# Altium PCB PCB1.PcbDoc
Units mil, origin at the board's own origin, x right, y up, seen from the top; angles counter-clockwise.
Board outline 1075 x 450 mil, 2 copper layers (Top Layer, Bottom Layer); 7 components, 4 nets, 20 pads, 0 vias.
Unrouted connection lines stored in the file: 6.
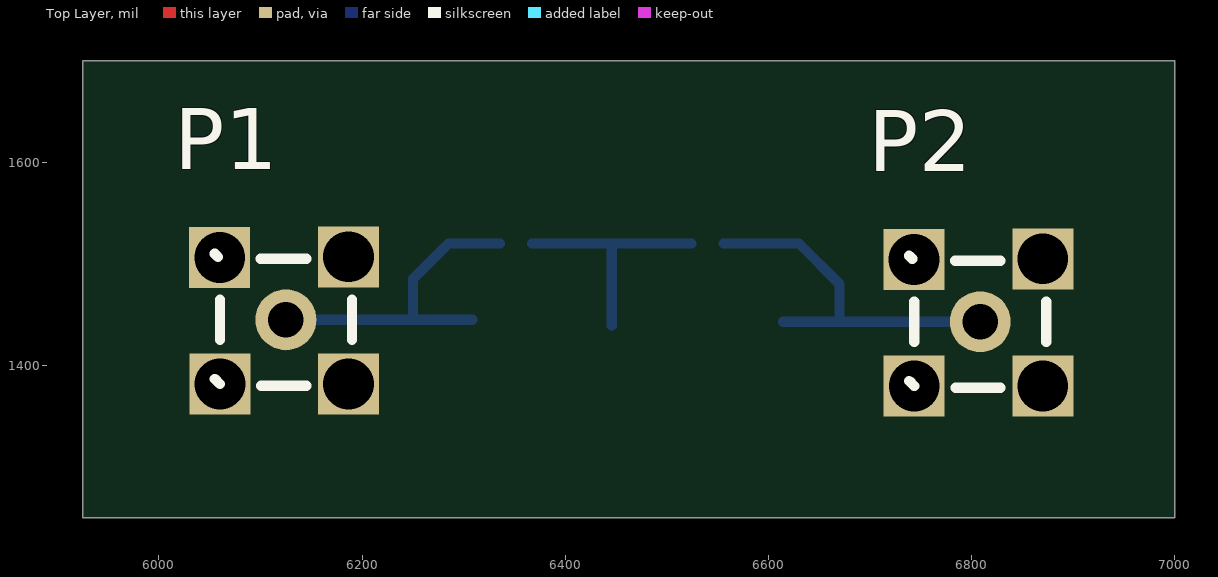
[diagram p0: Top Layer view]
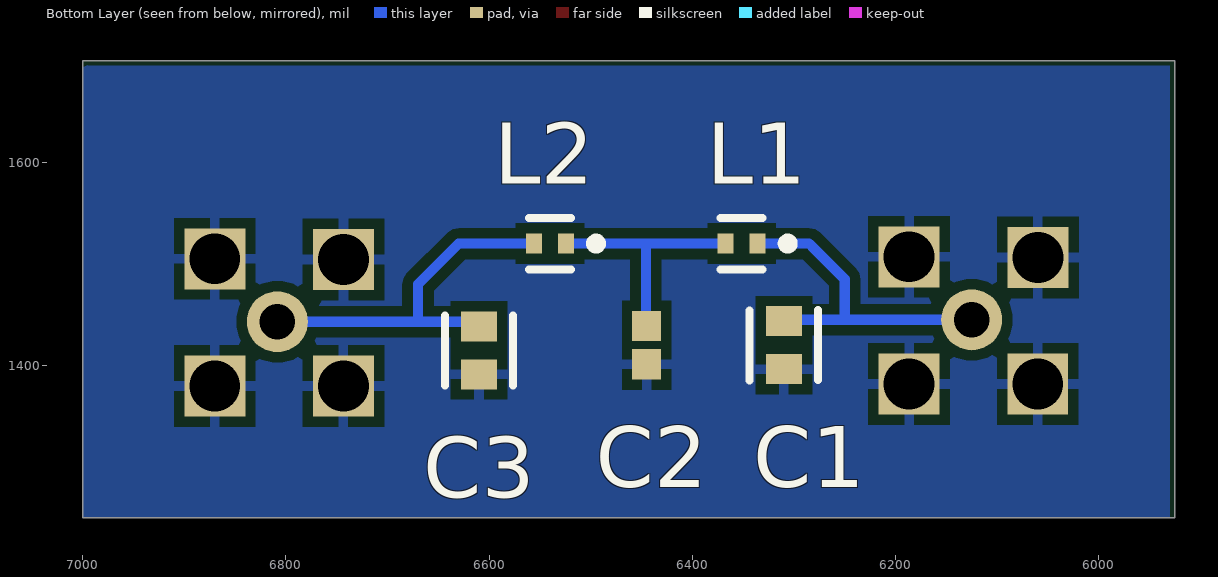
[diagram p1: Bottom Layer view, seen from below]

## Layer stack, top to bottom
Top Solder: solder mask 0.4, Solder Resist, Dk 3.5
Top Layer: signal copper 1.4
Dielectric 1: dielectric 12.6, FR-4, Dk 4.8
Bottom Layer: signal copper 1.4
Bottom Solder: solder mask 0.4, Solder Resist, Dk 3.5

## Board outline
5925,1250 7000,1250 7000,1700 5925,1700

## Design rules (kind name [scope] priority, off if disabled: settings)
Clearance [All] p1: gap=10 ignorepadtopadclearanceinfootprint=FALSE except(0: Arc-Hole Track-Hole SMDPad-Hole THPad-Hole Via-Hole Fill-Hole Poly-Hole Region-Hole Text-Hole)
PolygonConnect [All] p1: connectstyle=Relief reliefconductorwidth=10 reliefentries=4 polygonreliefangle="90 Angle" airgapwidth=10
RoutingVias [All] p1: holewidth=28 width=50 viastyle="Through Hole" minholewidth=28 minwidth=50 maxholewidth=28 maxwidth=50
SolderMaskExpansion [All] p1: expansion=4 istentingtop=FALSE
Width [All] p1: maxlimit=10 minlimit=10 preferedwidth=10
30 further rules are at their usual default settings.

## Components (designator, comment, footprint, x,y, rotation, side; value= is the part's Value field where it differs from the comment)
C1 "C0603C180F5GACTU" FP-C0603C-CF-MFG 6309.88,1420 r270 bottom value="18 pF"
C2 "C0402T330J3GACTU" CAPC1005X55X30ML05T10 6445,1420 r90 bottom
C3 "C0603C180F5GACTU" FP-C0603C-CF-MFG 6610,1415 r270 bottom value="18 pF"
L1 "LQG15WZ62NG02D" FP-LQG15HH_02-MFG 6351.38,1520 r0 bottom
L2 "LQG15WZ62NG02D" FP-LQG15HH_02-MFG 6540,1520 r0 bottom
P1 "COAX-M" COAX-M 6125,1445 r0 top
P2 "COAX-M" COAX-M 6808.41,1443.05 r0 top

## Footprints (in the part's own frame and the unit in brackets; to place one, negate y for a bottom-side part, rotate by r counter-clockwise, add the part's x,y. Pads: shape width x height; smd on the part's side, far side on the other; paste and mask are expansions set on the pad)
CAPC1005X55X30ML05T10 [mm] "Chip Capacitor, 2-Leads, Body 1.00x0.50mm, IPC Low Density"
  rect 0.76x0.72 smd: 1(-0.48,0) 2(0.48,0)
  body extent -0.53,-0.28 0.53,0.27, height 0.55
COAX-M [mil]
  round 60 hole 35: 1(0,0)
  rect 60x60 hole 50: 2(61.59,61.95) 3(-65.14,61.32) 4(-65,-63.17) 5(61.59,-63.17)
  silkscreen extent -70,-65 65,65, body extent -137,-137 137,136, height 512
FP-C0603C-CF-MFG [mm]
  rect 0.75x0.9 smd paste+0 mask+0: 1(-0.6,0) 2(0.6,0)
  silkscreen extent -0.87,-0.85 0.88,0.85, body extent -0.8,-0.4 0.8,0.4, height 0.87
FP-LQG15HH_02-MFG [mm]
  rect 0.4x0.5 smd paste+0 mask+0: 1(-0.4,0) 2(0.4,0)
  silkscreen extent -1.27,-0.64 0.53,0.65, body extent -0.5,-0.25 0.5,0.25, height 0.55

## Part data
C1 C3: library part CMP-03020-028712-1, "C0603 18 pF C0G 30ppm/°C 1.00% 50 V", Capacitance="18 pF", Manufacturer=KEMET, Package=C0603C-CF, Temperature="-55°C to +125°C", Temperature Characteristic=C0G, Temperature Coefficient=30ppm/°C, Temperature Range High=+125°C, Temperature Range Low=-55°C, Tolerance=0.01, Voltage Rating="50 V", Automotive=Yes, Automotive Grade="Grade 1", Category=Cap, ComponentLink2Description=Datasheet, ComponentLink2URL=https://api.kemet.com/component-edge/download/datasheet/C0603C100J5GACAUTO.pdf, Device Class L1="Passive Components", Device Class L2=Capacitors, Device Class L3="Ceramic Capacitors", Height=0.87mm, Lead Free=Yes, Manufacturer Part Number=C0603C180F5GACTU, Material=Ceramic, Mouser Description="Multilayer Ceramic Capacitors MLCC - SMD/SMT 50volts 18pF 1% C0G", Octopart=https://octopart.com/c0603c180f5gactu-kemet-47052343, RoHS=TRUE
C2: library part CMP-2008-03465-1, Manufacturer=Kemet, Part Number=C0402T330J3GACTU
L1 L2: library part CMP-06042-001578-1, "Fixed Inductors 0402 62nH 2% 180mA 1.9ohm AEC-Q200", Case Code (Imperial)=0402, Case Code (Metric)=1005, Current Rating=300mA, DC Resistance (DCR)=410mR, Inductance=12nH, Inductance Tolerance=5%, Max Operating Temperature=125°C, Min Operating Temperature=-55°C, Package Quantity=10000, Self Resonant Frequency=2.8GHz, Test Frequency=100MHz, Case/Package=0402, Core Material=Air, DC Current=300mA, Depth=0.55mm, Height=0.02inch, Height - Seated (Max)=0.022inch, Lead Free="Lead Free", Length=0.039inch, Max DC Current=300mA, Military Standard=Not, Mount="Surface Mount", Packaging="Cut Tape", Q Factor=8, Radiation Hardening=No, REACH SVHC="No SVHC", Shielding=Unshielded, Termination=SMD/SMT, Tolerance=5%, Width=0.02inch

## Nets (pads, with @x,y where several pads share a name; then routed paths per layer and width w, separated by ;. In a path a pad name is that pad's centre, name@x,y a point inside that pad or via, vN(x,y) a via of type N, cw(c..) or ccw(c..) an arc to the next point about the centre after c; other vN are vias at no path point)
GND: C1.2 C2.1 C3.2 P1.2 P1.3 P1.4 P1.5 P2.2 P2.3 P2.4 P2.5
NetC1_1: C1.1 L1.1 P1.1
NetC2_2: C2.2 L1.2 L2.1
NetC3_1: C3.1 L2.2 P2.1
copper on no net: | length 938.1
  Bottom Layer w10: 6125,1445 6308.5,1445 ; 6250,1445 6250,1485 6280,1515 6285,1520 6335.63,1520 ; 6375,1520 6367.13,1520 6524.25,1520 6515,1520 ; 6445.69,1439.59 6445.69,1520 ; 6555.75,1520 6630,1520 6670,1480 6670,1445 ; 6614.43,1443.05 6808.41,1443.05

## Polygon pours and split planes (outlines as drawn)
GND on Bottom Layer "GND_L02_P000" (solid, pour order 0): 7000,1700 6995,1695 5930,1695 5930,1250 7000,1250

## Silkscreen, mask and mechanical layers (free items; w line width, h text height)
Mechanical 1:
  lines w10: 5925,1250 5925,1700 7000,1700 7000,1450 7000,1250 5925,1250